# Altium PCB 2017_CARTE_PUISSANCE.PCBDOC
Units mil, origin at the board's own origin, x right, y up, seen from the top; angles counter-clockwise.
Board outline 1891 x 1418 mil, 4 copper layers (1-TOP, 2-PSSCE, 3-GND, 4-BOTTOM); 50 components, 29 nets, 181 pads, 69 vias.
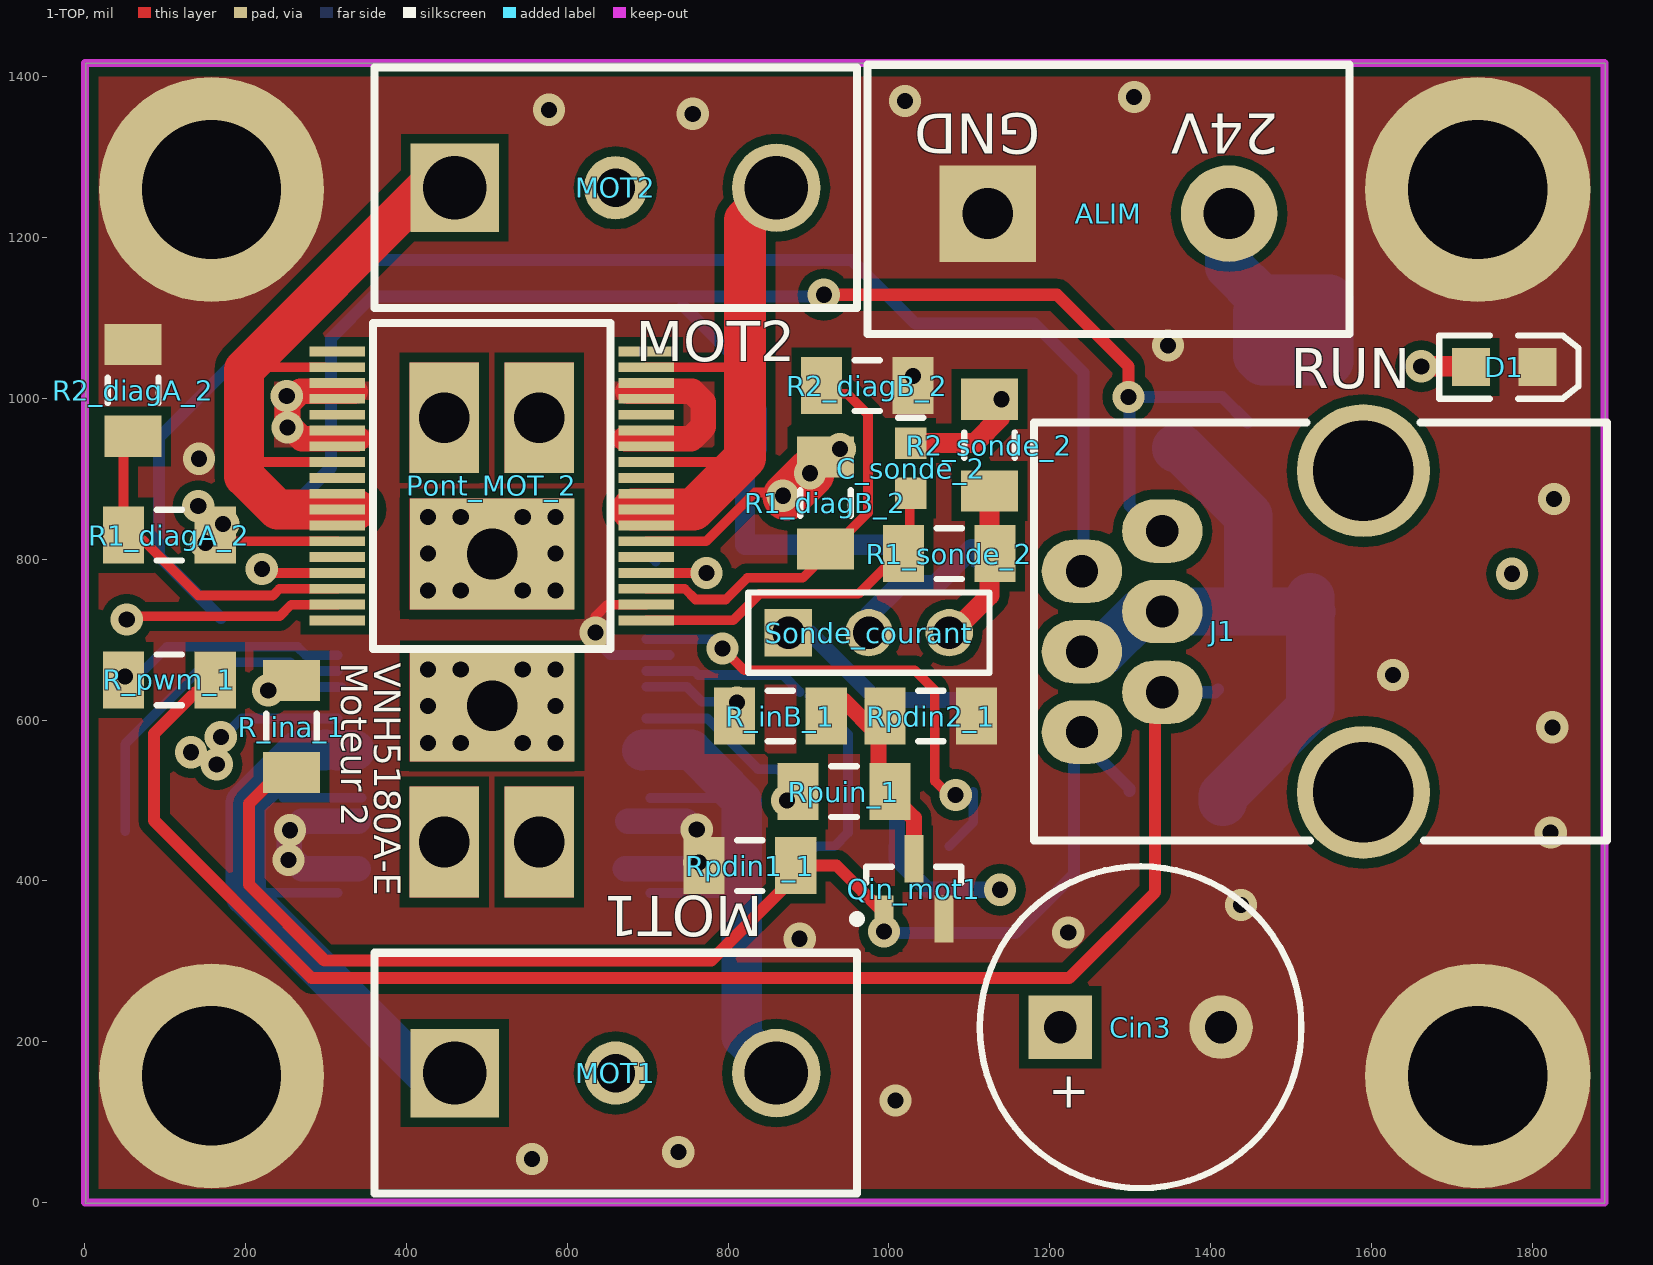
[diagram p0: 1-TOP view]
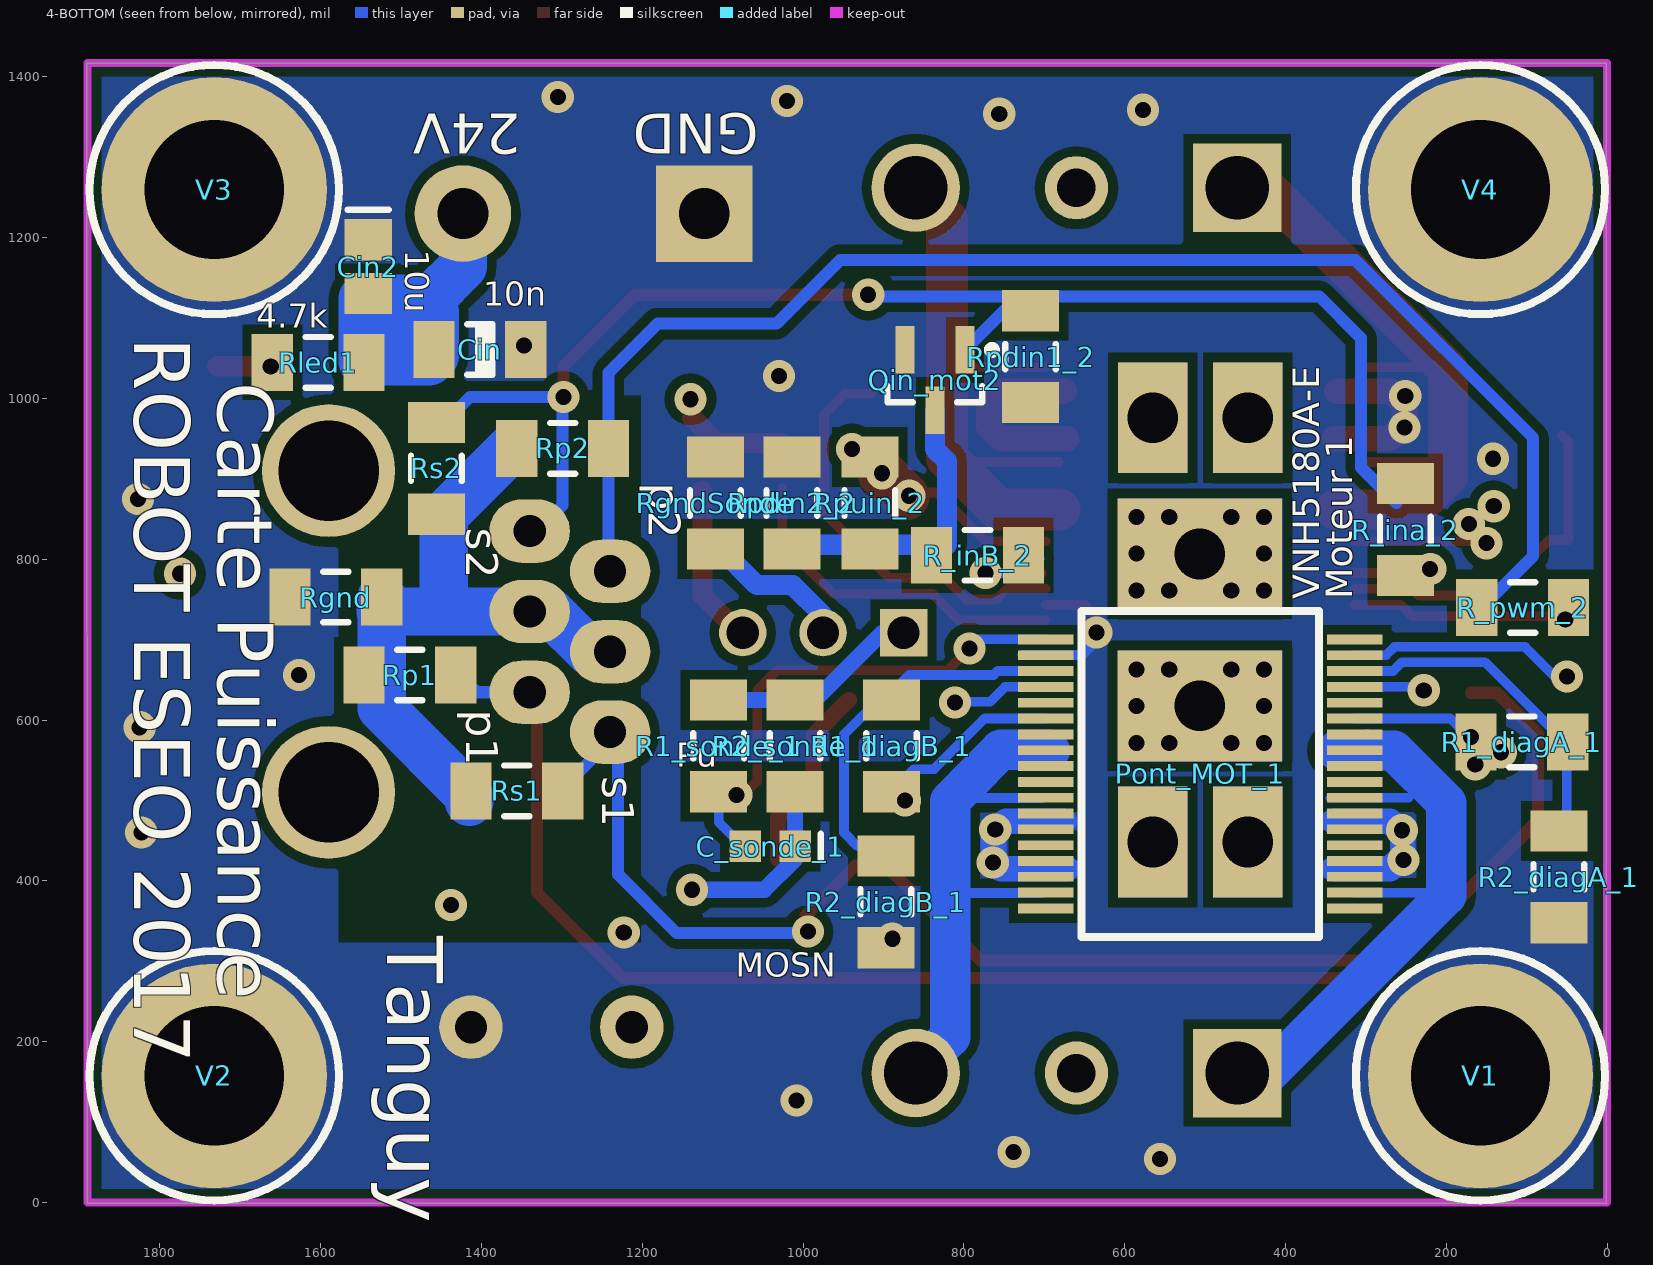
[diagram p1: 4-BOTTOM view, seen from below]
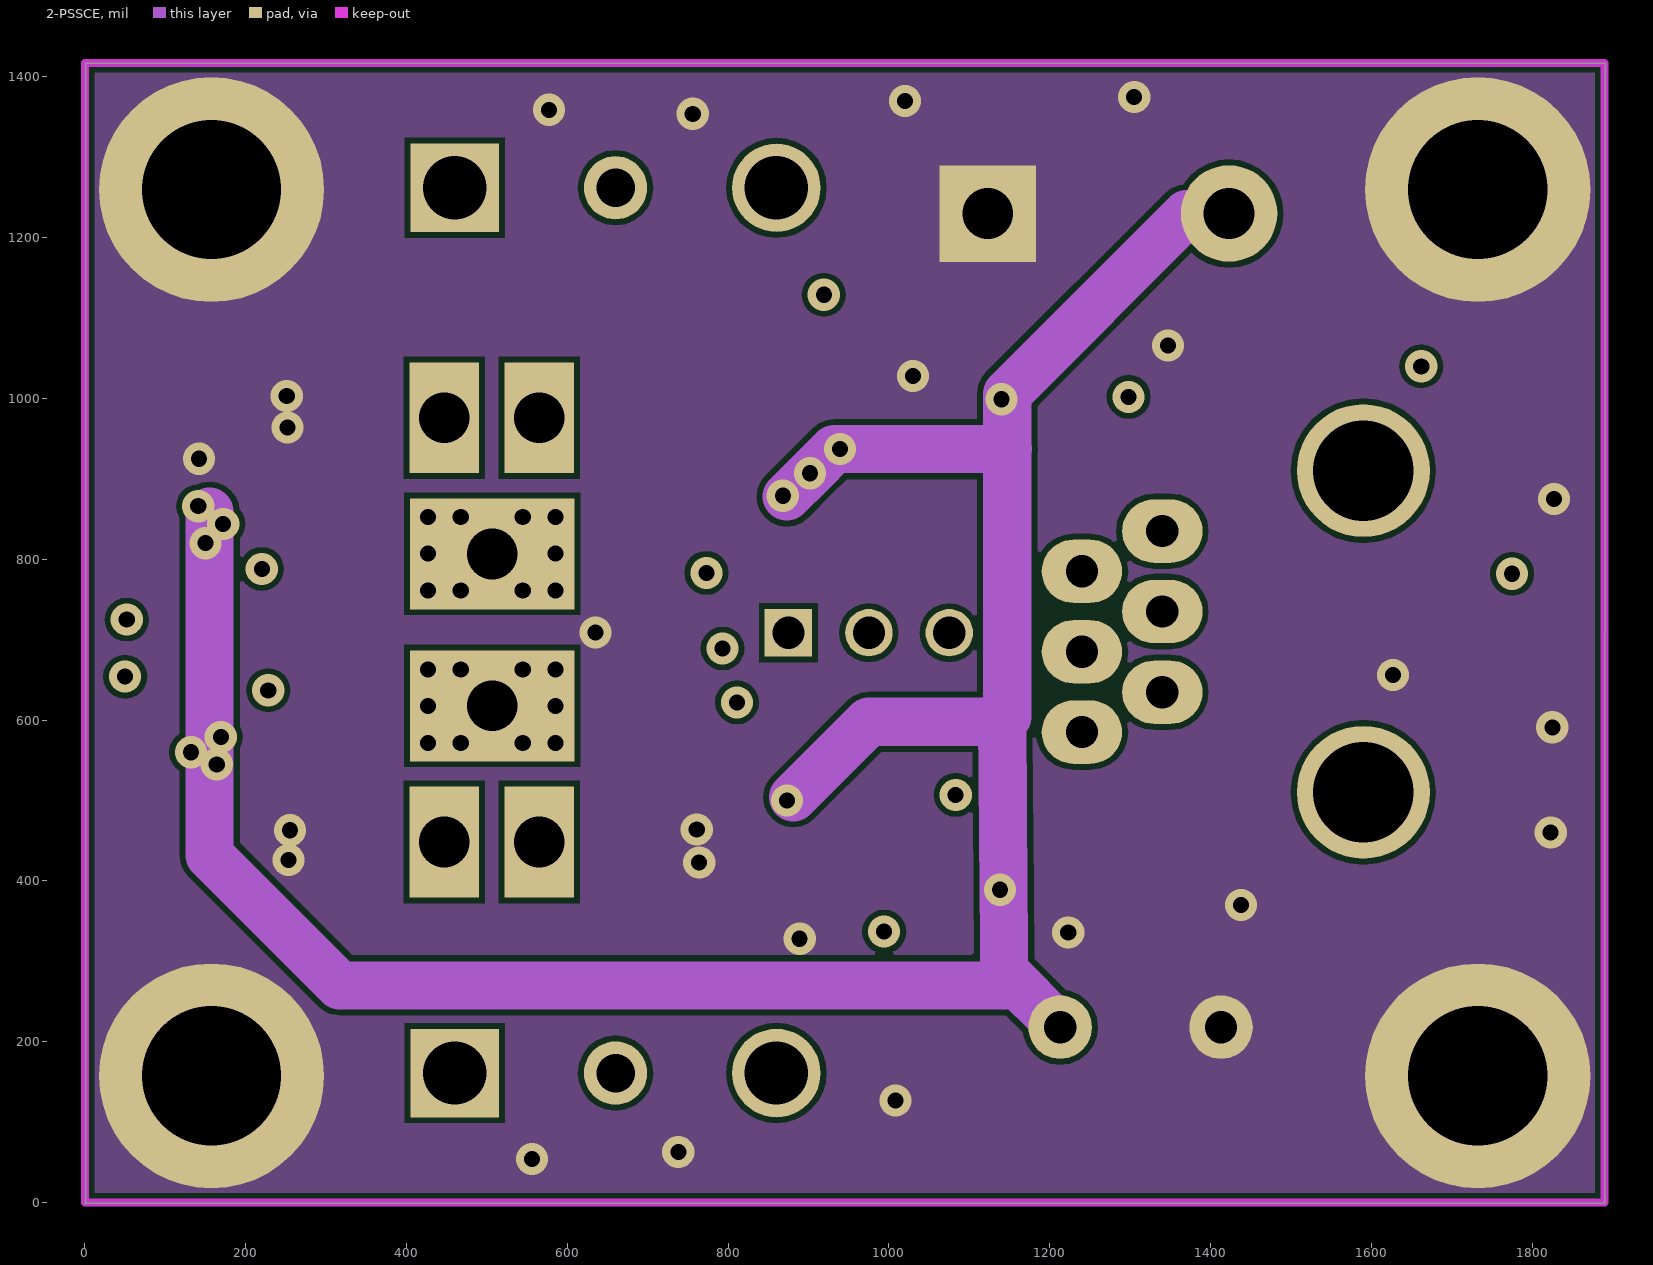
[diagram p2: 2-PSSCE]
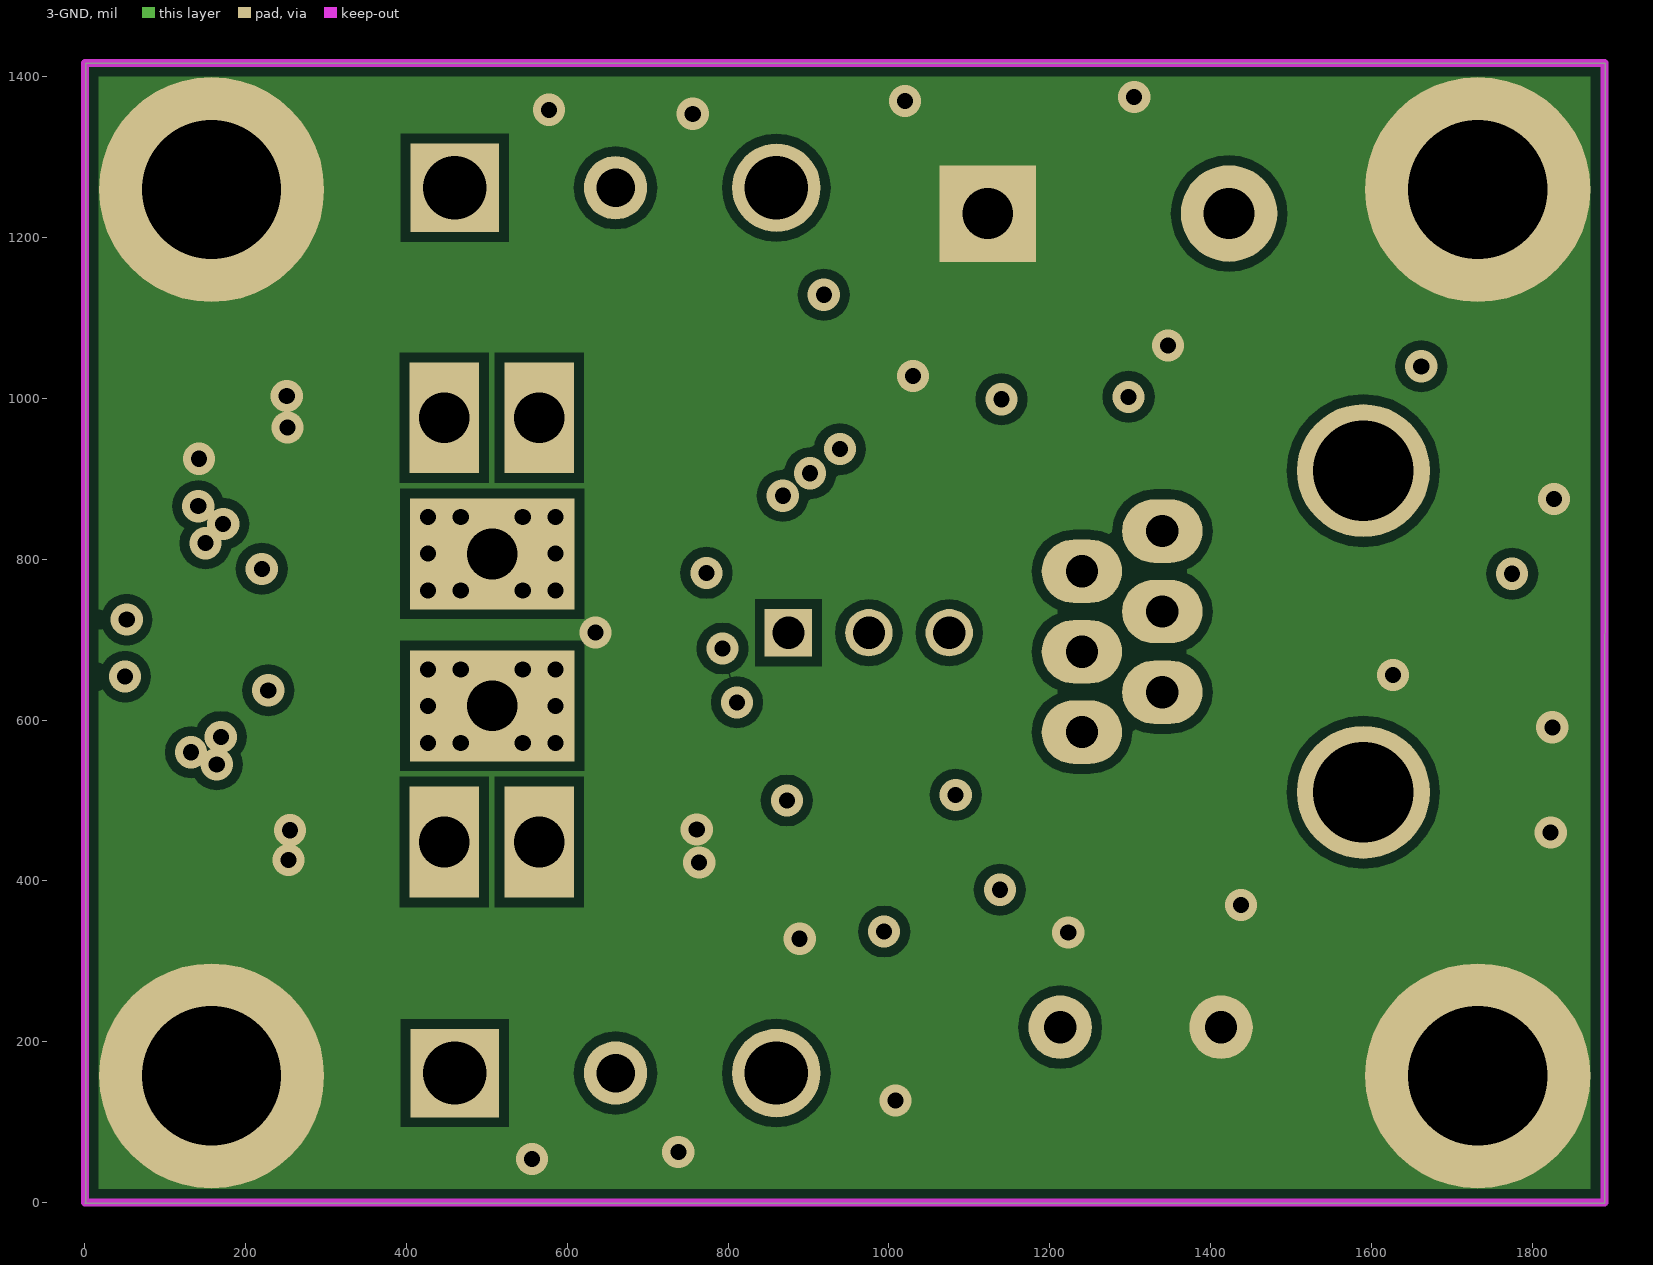
[diagram p3: 3-GND]
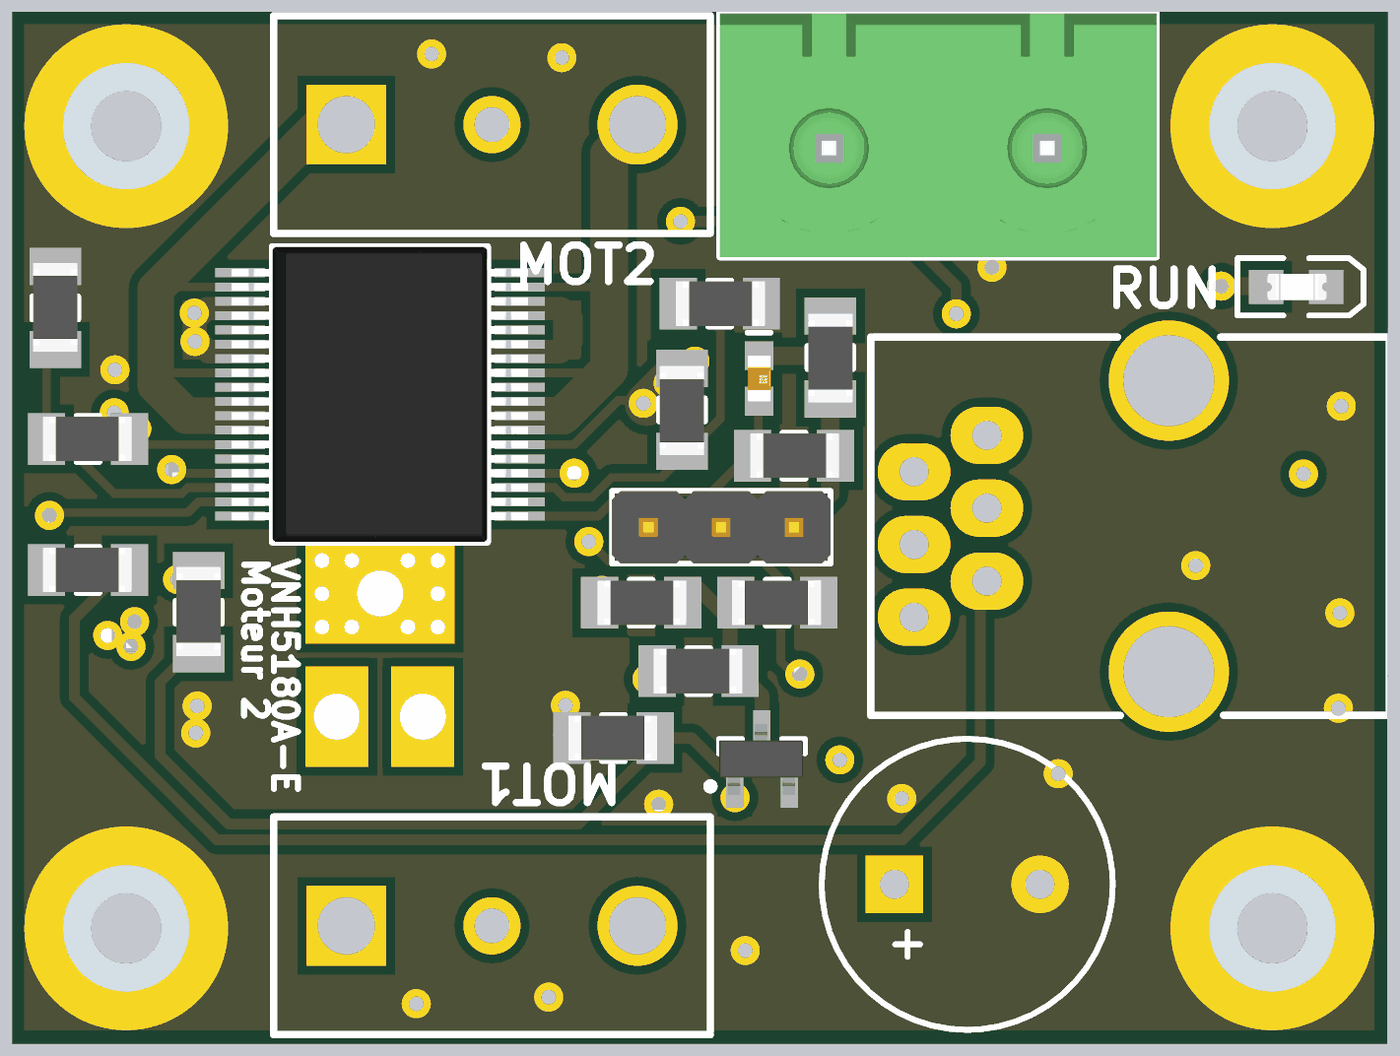
[diagram p4: 3D render of the assembled board from above, using the file's embedded part models]
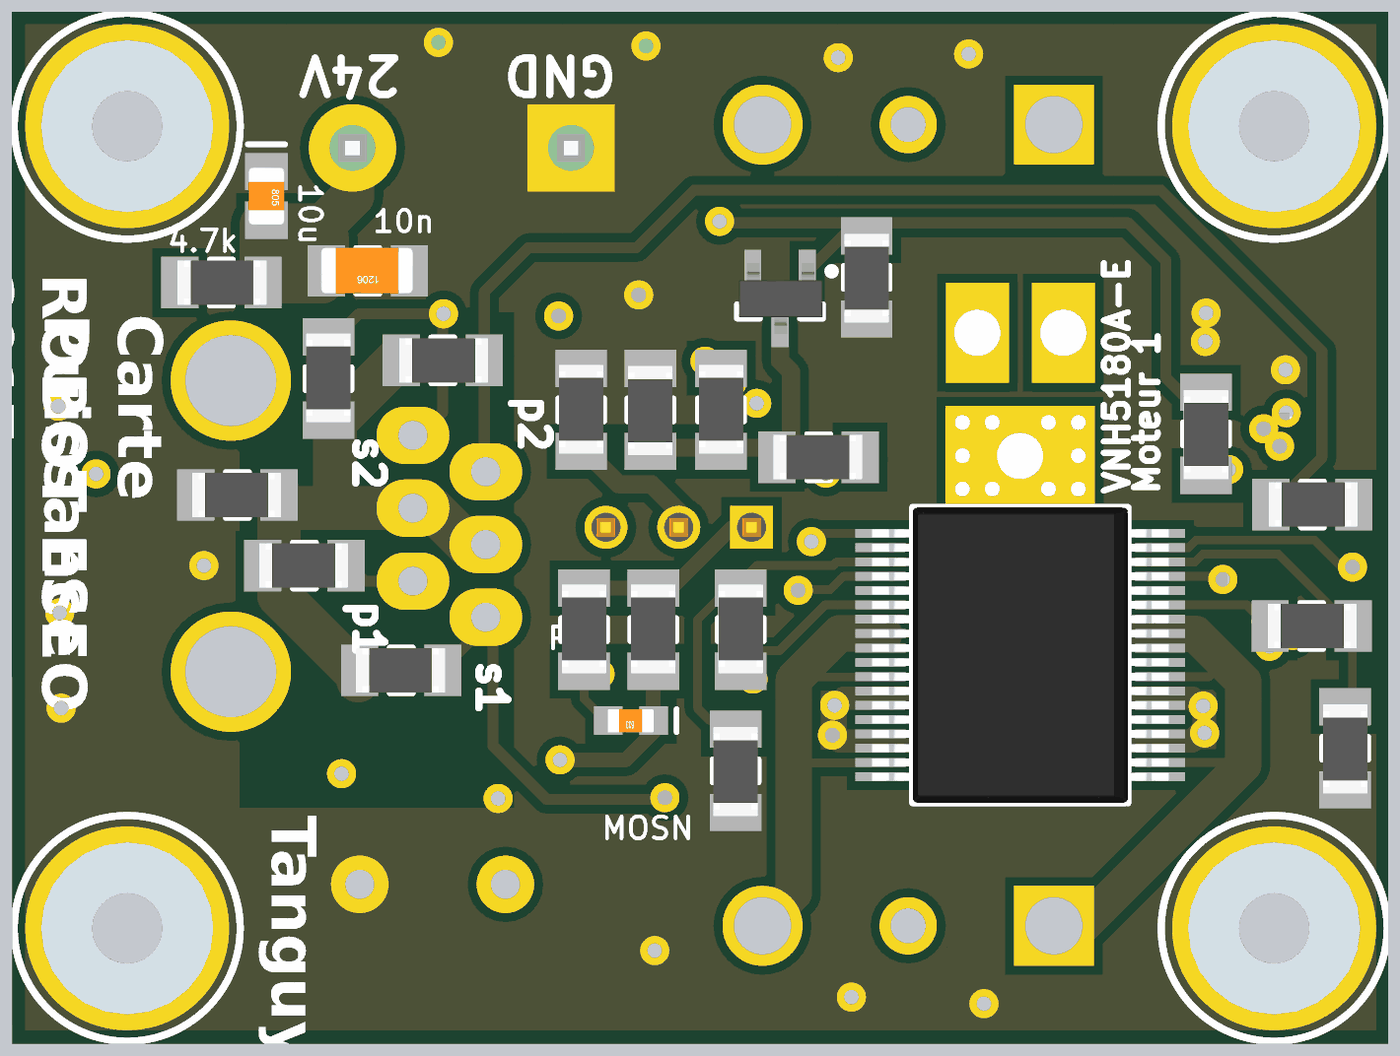
[diagram p5: 3D render of the assembled board from below, using the file's embedded part models]

## Layer stack, top to bottom
Top Solder: solder mask 0.4, Solder Resist, Dk 3.5
1-TOP: signal copper 1.4
Dielectric1: prepreg 12.6, FR-4, Dk 4.8
2-PSSCE: signal copper 1.4
Dielectric2: core 12.6, FR-4, Dk 4.8
3-GND: signal copper 1.4
Dielectric3: prepreg 12.6, FR-4, Dk 4.8
4-BOTTOM: signal copper 1.4
Bottom Solder: solder mask 0.4, Solder Resist, Dk 3.5

## Board outline
1891,1417 1890,-1 0,-1 1,0 1,1417

## Design rules (kind name [scope] priority, off if disabled: settings)
Clearance Clearance_2 [InNamedPolygon('2-MOT1_1') Or  InNamedPolygon('1-GND') Or  InNamedPolygon('3-GND') Or  InNamedPolygon('2-MOT1_2') Or  InNamedPolygon('2-MOT2_1') Or  InNamedPolygon('2-MOT2_2') Or  InNamedPolygon('4-GND') Or  InNamedPolygon('2-24V')] p1: gap=12
Clearance Clearance_1 [InNamedPolygon('2-MOT1_1') Or  InNamedPolygon('2-24V') Or  InNamedPolygon('2-MOT2_1') Or  InNamedPolygon('2-MOT2_2') Or  InNamedPolygon('2-MOT1_2')] p2: gap=300
Clearance [All] p3: gap=7
FabricationTestPointUsage TestPointUsage [All] p1: valid=0 allowmultiple=FALSE
FabricationTestpoint Testpoint [(IsPad And (OnTopLayer Or OnBottomLayer))] p1: side=3 testpointundercomponent=TRUE minsize=40 maxsize=100 preferedsize=60 minholesize=0 maxholesize=40 preferedholesize=32 testpointgrid=1 allowsidetop=TRUE allowsidebottom=TRUE usegrid=TRUE gridtolerance=0.01
PlaneClearance [All] p1: clearance=10
PlaneConnect [All] p1: planeconnectstyle=Direct reliefexpansion=25 reliefentries=4 reliefconductorwidth=12 reliefairgap=15
PolygonConnect [All] p1: connectstyle=Direct reliefconductorwidth=10 reliefentries=4 polygonreliefangle="90 Angle" airgapwidth=10
RoomDefinition 2017_CARTE_PUISSANCE [InComponentClass('2017_CARTE_PUISSANCE')] p1: confinementstyle=ConfineIn formatcopy=TRUE lockcomponents=FALSE outline 1977,113 3421,113 3421,545 1977,545
RoutingLayers RoutingLayers_1 [All] p1: top layer_v5=TRUE mid layer 1_v5=FALSE mid layer 2_v5=FALSE bottom layer_v5=TRUE
RoutingLayers [All] p2: top layer_v5=TRUE mid layer 1_v5=FALSE mid layer 2_v5=FALSE bottom layer_v5=TRUE
RoutingVias [All] p1: holewidth=28 width=50 viastyle="Through Hole" minholewidth=28 minwidth=50 maxholewidth=28 maxwidth=50
SolderMaskExpansion [All] p1: expansion=0
Width [All] p1: maxlimit=60 minlimit=10 preferedwidth=15
24 further rules are at their usual default settings.

## Components (designator, comment, footprint, x,y, rotation, side; value= is the part's Value field where it differs from the comment)
ALIM "BORNIER2" BORNIER2_MALE_DROIT 1273,1230 r0 top
C_sonde_1 "33nF" C0603_N 1041,443 r0 bottom
C_sonde_2 "33nF" C0603_N 1027,913 r270 top
Cin "10uF" C1206_N 1402,1061 r0 bottom
Cin2 "10nF" C0805_N 1541,1164 r270 bottom
Cin3 "Cin3" COND_POL_RAD_5.08B 1213,218 r0 top
D1 "LED" LED_0805 1765,1039 r0 top
J1 "CdeMot" RJ11_6/6 1240,785 r0 top
MOT1 "BORNIER3" BORNIER3 460,161 r0 top
MOT2 "BORNIER3" BORNIER3 460,1262 r0 top
Pont_MOT_1 "VNH5180A-E" "PowerSSO-36 TP" 506,533 r90 bottom
Pont_MOT_2 "VNH5180A-E" "PowerSSO-36 TP" 506,891.27 r270 top
Qin_mot1 "MOSN" SOT23-3N 1031,390 r90 top
Qin_mot2 "MOSN" SOT23-3N 836,1023 r270 bottom
R1_diagA_1 "100K" R1206_N 106,573 r180 bottom
R1_diagA_2 "100K" R1206_N 105,830 r180 top
R1_diagB_1 "100K" R1206_N 890,568 r90 bottom
R1_diagB_2 "100K" R1206_N 921,870 r270 top
R1_sonde_1 "47" R1206_N 1105,568 r90 bottom
R1_sonde_2 "47" R1206_N 1075,807 r0 top
R2_diagA_1 "22K" R1206_N 60,405 r270 bottom
R2_diagA_2 "22K" R1206_N 60,1010 r90 top
R2_diagB_1 "22K" R1206_N 897,374 r270 bottom
R2_diagB_2 "22K" R1206_N 973,1016 r0 top
R2_sonde_1 "330" R1206_N 1010,568 r90 bottom
R2_sonde_2 "330" R1206_N 1125,942 r270 top
R_ina_1 "1K" R1206_N 257,592 r90 top
R_ina_2 "1K" R1206_N 251,837 r270 bottom
R_inB_1 "1K" R1206_N 865,605 r0 top
R_inB_2 "1K" R1206_N 783,805 r0 bottom
R_pwm_1 "1K" R1206_N 105,650 r180 top
R_pwm_2 "1K" R1206_N 105,740 r180 bottom
Rgnd "100" R1206_N 1581,753 r0 bottom
RgndSonde "100" R1206_N 1109,870 r90 bottom
Rled1 "1.5k" R1206_N 1603,1045 r180 bottom
Rp1 "10k" R1206_N 1489,656 r0 bottom
Rp2 "10k" R1206_N 1299,938 r180 bottom
Rpdin1_1 "10k" R1206_N 827,419 r180 top
Rpdin1_2 "10k" R1206_N 717,1052 r270 bottom
Rpdin2_1 "22k" R1206_N 1052,605 r180 top
Rpdin2_2 "22k" R1206_N 1014,870 r270 bottom
Rpuin_1 "100k" R1206_N 944,511 r180 top
Rpuin_2 "100k" R1206_N 917,870 r90 bottom
Rs1 "10k" R1206_N 1356,512 r0 bottom
Rs2 "10k" R1206_N 1456,913 r90 bottom
Sonde_courant "Header 3" HDR1X3 875,708.66 r0 top
V1 "Entretoise WURTH CMS" ENTRETOISE_CMS 157.48,157.48 r180 bottom
V2 "Entretoise WURTH CMS" ENTRETOISE_CMS 1732.28,157.48 r180 bottom
V3 "Entretoise WURTH CMS" ENTRETOISE_CMS 1732.28,1259.84 r180 bottom
V4 "Entretoise WURTH CMS" ENTRETOISE_CMS 157.48,1259.84 r180 bottom

## Footprints (in the part's own frame and the unit in brackets; to place one, negate y for a bottom-side part, rotate by r counter-clockwise, add the part's x,y. Pads: shape width x height; smd on the part's side, far side on the other; paste and mask are expansions set on the pad)
BORNIER2_MALE_DROIT [mil] "7.62 mm - Closed Vertical PCB Header - 2p - 691 311 400 102"
  rect 120x120 hole 62.99: 1(-150,0)
  round 120 hole 62.99: 2(150,0)
  silkscreen extent -300,-150 300,185, body extent -300,-150 300,185, height 473
BORNIER3 [mil] "Connector; Header; 3 Position; screw terminal blocks, Pin Spacing=5.08mm"
  rect 110x110 hole 78.74: 1(0,0)
  round 78.74 hole 48: 2(200,0)
  round 110 hole 78.74: 3(400,0)
  silkscreen extent -100,-150 500,150
C0603_N [mm] "Chip Capacitor, Body 1.6x0.8mm, IPC Medium Density"
  rect 1x1 smd: 1(-0.8,0) 2(0.787,0)
  silkscreen extent -1.6,-0.4 -1.6,0.4, body extent -0.8,-0.39 0.8,0.41, height 0.32
C0805_N [mm] "Chip Capacitor, Body 2.0x1.3mm, IPC Medium Density"
  rect 1.3x1.5 smd: 1(-0.85,0) 2(0.85,0)
  silkscreen extent -1.8,-0.65 -1.8,0.65, body extent -0.99,-0.63 1.01,0.63, height 0.8
C1206_N [mm] "Chip Capacitor, Body 3.2x1.6mm, IPC Medium Density"
  rect 1.3x1.8 smd: 1(-1.45,0) 2(1.45,0)
  silkscreen extent -0.4,-0.8 0.4,0.8, body extent -1.57,-0.81 1.63,0.79, height 1.02
COND_POL_RAD_5.08B [mil] "Capacitor; Polarized; Radial; 10.16mm x 5.08mm"
  rect 79x79 / inner round 79 / far side round 79 hole 40: 1(0,0)
  round 79 hole 40: 2(200,0)
  silkscreen extent -100,-200 300,200
ENTRETOISE_CMS [mil] "Entretoise CMS Wurth trou 4.4mm"
  round 280 hole 173.23: 1(0,0)
  silkscreen extent -155,-155 155,155, body extent -118,-118 118,117, height 118
HDR1X3 [mm]
  rect 1.5x1.5 hole 1.016: 1(0,0)
  round 1.5 hole 1.016: 2(2.54,0) 3(5.08,0)
  silkscreen extent -1.27,-1.27 6.35,1.27, body extent -1.27,-1.27 6.35,1.27, height 10.1
LED_0805 [mm] "SM LED; 2 Flat Leads"
  rect 1.2x1.2 smd: 1(-1.05,0) 2(1.05,0)
  silkscreen extent -2.05,-1 2.35,1, body extent -1.05,-0.64 1.06,0.64, height 1.2
"PowerSSO-36 TP" [mm] "PowerSSO-36 TP"
  rect 3.5x2.2 hole 1.6: 0(-2.15,-1.5) 0(-2.15,1.5)
  rect 3.5x5.2 hole 1.6: 0(2.15,0.01)
  rect 0.31x1.75 smd: 1(-4.25,-4.875) 2(-3.75,-4.875) 3(-3.25,-4.875) 4(-2.75,-4.875) 5(-2.25,-4.875) 6(-1.75,-4.875) 7(-1.25,-4.875) 8(-0.75,-4.875) 9(-0.25,-4.875) 10(0.25,-4.875) 11(0.75,-4.875) 12(1.25,-4.875) 13(1.75,-4.875) 14(2.25,-4.875) 15(2.75,-4.875) 16(3.25,-4.875) 17(3.75,-4.875) 18(4.25,-4.875) 19(4.25,4.875) 20(3.75,4.875) 21(3.25,4.875) 22(2.75,4.875) 23(2.25,4.875) 24(1.75,4.875) 25(1.25,4.875) 26(0.75,4.875) 27(0.25,4.875) 28(-0.25,4.875) 29(-0.75,4.875) 30(-1.75,4.875) 31(-1.25,4.875) 32(-2.25,4.875) 33(-3.25,4.875) 34(-2.75,4.875) 35(-3.75,4.875) 36(-4.25,4.875)
  1-TOP region: -3.9,-0.4 -0.4,-0.4 -0.4,-2.6 -3.9,-2.6
  1-TOP region: -3.9,2.6 -0.4,2.6 -0.4,0.4 -3.9,0.4
  1-TOP region: 0.4,2.6 3.9,2.6 3.9,-2.6 0.4,-2.6
  4-BOTTOM region: 0.4,2.6 3.9,2.6 3.9,-2.6 0.4,-2.6
  4-BOTTOM region: -3.9,-0.4 -0.4,-0.4 -0.4,-2.6 -3.9,-2.6
  4-BOTTOM region: -3.9,2.6 -0.4,2.6 -0.4,0.4 -3.9,0.4
  silkscreen extent -5.15,-3.75 5.15,3.75, body extent -5.15,-5.17 5.15,5.17, height 2.33
R1206_N [mm] "Chip Resistor, Body 3.2x1.6mm, IPC Medium Density"
  rect 1.3x1.8 smd: 1(-1.45,0) 2(1.45,0)
  silkscreen extent -0.4,-0.8 0.4,0.8, body extent -1.68,-0.87 1.68,0.87, height 0.71
RJ11_6/6 [mm] "Connector; RJ11; 6P/6C; Low Profil; Right Angle; Pin Spacing=2.54mm"
  oval 2.54x2 hole 1.016: 1(0,-5.08) 2(2.54,-3.82) 3(0,-2.54) 4(2.54,-1.27) 5(0,0) 6(2.54,1.27)
  round 4.2 hole 3.175: FIX1(8.89,3.18) FIX2(8.89,-6.98)
  silkscreen extent -1.51,-8.51 16.59,4.7
SOT23-3N [mm] "SOT23, 3-Leads, Body 2.9x1.3mm, Pitch 0.95mm, Lead Span 2.5mm, IPC Medium Density"
  rect 1.5x0.6 smd: 1(-0.95,0.95) 2(-0.95,-0.95) 3(0.95,0)
  silkscreen extent -1.07,-1.5 0.7,1.92, body extent -1.24,-1.5 1.23,1.5, height 1.1

## Part data
ALIM MOT1 MOT2: "Terminal blocks, 2 pins, pitch=5mm"
C_sonde_1 C_sonde_2: library part Condensateur, "Capacitor"
Cin Cin2: library part Capacitor, "Capacitor"
Cin3: library part CONDENSATEUR_POLARISE, "Polarized Capacitor"
D1: "Typical LED"
J1: library part CONNECTEUR_RJ12
Qin_mot1 Qin_mot2: library part "Transistor MOSFET-N", "N-Channel MOSFET"
R1_diagA_1 R1_diagA_2 R1_diagB_1 R1_diagB_2 R1_sonde_1 R1_sonde_2 R2_diagA_1 R2_diagA_2 R2_diagB_1 R2_diagB_2 R2_sonde_1 R2_sonde_2 R_ina_1 R_ina_2 R_inB_1 R_inB_2 R_pwm_1 R_pwm_2 Rgnd RgndSonde Rled1 Rp1 Rp2 Rpdin1_1 Rpdin1_2 Rpdin2_1 Rpdin2_2 Rpuin_1 Rpuin_2 Rs1 Rs2: library part Resistor, "Resistor"
Sonde_courant: "Header, 3-Pin"
V1 V2 V3 V4: "Entretoise Wurth"

## Via types
v1: diameter 40, hole 20, 1-TOP to 4-BOTTOM, 69 vias

## Nets (pads, with @x,y where several pads share a name; then routed paths per layer and width w, separated by ;. In a path a pad name is that pad's centre, name@x,y a point inside that pad or via, vN(x,y) a via of type N, cw(c..) or ccw(c..) an arc to the next point about the centre after c; other vN are vias at no path point)
24V: ALIM.2 C_sonde_1.1 C_sonde_2.1 Cin2.2 Cin3.1 Cin.2 Pont_MOT_1.13 Pont_MOT_1.24 Pont_MOT_2.13 Pont_MOT_2.24 R1_diagA_1.1 R1_diagA_2.1 R1_diagB_1.1 R1_diagB_2.1 R2_sonde_1.1 R2_sonde_2.1 Rled1.2 Rpuin_1.2 Rpuin_2.2 | length 4924.1
  1-TOP w12: R1_diagA_2.1@162.09,822.37 Pont_MOT_2.13 ; Pont_MOT_2.24 772.7,822.37 833.33,883 v1@863,883
  1-TOP w25: C_sonde_2.1 1106.5,944.5 R2_sonde_2.1@1138,975.99
  1-TOP w60: v1@873,878 v1(902,907)
  2-PSSCE w60: v1@155,859 155,432 317.02,269.98 1143.54,269.98 ; v1@873,878 v1(902,907) v1@932,937 ; v1@881,504 975,598 1141,598 ; v1(939,937) 1147,937 ; 1148,937 1147,937 ; Cin3.1@1214,217 1143.54,287.46 1143.54,269.98 ; ALIM.2@1423,1229 1370,1229 1147,1006 1147,937 ; 1141,598 1147,604 1147,937 ; 1141,598 1142.62,389.04 1143.54,269.98
  4-BOTTOM w12: R1_diagA_1.1@170.5,577.5 194.9,601.9 Pont_MOT_1.13 ; Pont_MOT_1.24 774.1,601.9 837,539 862,539 R1_diagB_1.1@882,519
  4-BOTTOM w20: C_sonde_1.1 1009.5,427.5 C_sonde_1.1@1010,427 ; R2_sonde_1.1 C_sonde_1.1@1010,427 ; v1(1138,389) 1048,389 C_sonde_1.1@1010,427
  4-BOTTOM w60: ALIM.2@1423,1228 1423,1164 1463,1124 1548,1124 1548,1046 1465,1046 1458,1053 1458,1107 1488,1107 1518,1077
  other v1: 873,500 164,545 132,560 169,579 150,820 172,844 141,866 868,879 1140,999
GND: ALIM.1 Cin2.1 Cin3.2 Cin.1 D1.2 Pont_MOT_1.3 Pont_MOT_1.4 Pont_MOT_1.6 Pont_MOT_1.7 Pont_MOT_1.20 Pont_MOT_1.30 Pont_MOT_1.31 Pont_MOT_1.33 Pont_MOT_1.34 Pont_MOT_2.3 Pont_MOT_2.4 Pont_MOT_2.6 Pont_MOT_2.7 Pont_MOT_2.20 Pont_MOT_2.30 Pont_MOT_2.31 Pont_MOT_2.33 Pont_MOT_2.34 Qin_mot1.2 Qin_mot2.2 R2_diagA_1.2 R2_diagA_2.2 R2_diagB_1.2 R2_diagB_2.2 Rgnd.2 RgndSonde.2 Rpdin1_1.2 Rpdin1_2.2 Rpdin2_1.1 Rpdin2_2.1 V1.1 V2.1 V3.1 V4.1 | length 1068.4
  1-TOP w12: v1@635,707 v1(635,709) 635,729 649.63,743.63 Pont_MOT_2.20
  1-TOP w32: 336,1009 268,1009 252,993 252,968 270,950 339,950 ; 672,950 754,950 769,965 769,995 755,1009 675,1009
  4-BOTTOM w12: v1@636,698 653,681 Pont_MOT_1.20@727,681
  4-BOTTOM w32: 340,415 270,415 254,431 254,458 270,474 340.07,474 ; 672,415 754,415 763,424 763,459 748,474 675,474
  other v1: 556,54 738,63 1008,127 889,328 1223,336 1438,370 764,423 253,426 1823,460 255,463 761,464 1825,591 1627,656 1827,875 142,925 252,964 251,1003 1030,1028 1347,1066 756,1354 577,1359 1020,1370 1305,1375
GND_CDE: J1.3 J1.4 Rgnd.1 Rp1.2 Rp2.1 Rs1.2 Rs2.1 | length 871.9
  4-BOTTOM w60: J1.3@1230,685 1265,685 1313,733 J1.4@1346,733 ; J1.4@1330,735 1444,735 ; Rp2.1@1357,938 1363,938 1447,854 1447,735 Rgnd.1@1523.91,735 ; Rs1.2@1415,498 1415,506 1523.91,614.91 Rgnd.1@1523.91,735 ; Rgnd.1 Rgnd.1@1523.91,735 ; Rgnd.1@1525.09,735 Rgnd.1@1523.91,735
I_SONDE_1: R1_sonde_1.2 R2_sonde_1.2 Sonde_courant.1 | length 247.3
  4-BOTTOM w20: Sonde_courant.1@875,708 902,708 984.91,625.09 R1_sonde_1.2@1088,625.09
I_SONDE_2: R1_sonde_2.2 R2_sonde_2.2 Sonde_courant.3 | length 202
  1-TOP w25: Sonde_courant.3@1074,704 1125,755 R2_sonde_2.2
IN1_2: Qin_mot1.3 R_inB_1.2 Rpdin2_1.2 Rpuin_1.1 | length 234
  1-TOP w20: R_inB_1.2@943,625 987,581 987,522 1031,478 Qin_mot1.3
IN2_2: Qin_mot2.3 R_inB_2.2 Rpdin2_2.2 Rpuin_2.1 | length 372.5
  4-BOTTOM w25: Qin_mot2.3 836,937 821,922 821,818 1014,818 Rpdin2_2.2@1018,814
MOT1+: MOT1.1 Pont_MOT_1.2 Pont_MOT_1.8 Pont_MOT_1.10 Pont_MOT_1.11 Pont_MOT_1.12 | length 818.8
  4-BOTTOM w12: 210,390 214.64,385.36 Pont_MOT_1.2 ; 246.53,503.47 Pont_MOT_1.8@344.07,503.47
  4-BOTTOM w50: Pont_MOT_1.11@299,563 298,562 265,562 200,497 200,382 424,158 MOT1.1@459,158 ; Pont_MOT_1.11 335.47,562.53 Pont_MOT_1.11@336,562
MOT1-: MOT1.3 Pont_MOT_1.25 Pont_MOT_1.26 Pont_MOT_1.27 Pont_MOT_1.29 Pont_MOT_1.35 | length 704.4
  4-BOTTOM w12: Pont_MOT_1.35@702.93,385 797,385 ; Pont_MOT_1.29@702.93,503 798,503
  4-BOTTOM w50: Pont_MOT_1.26@693,562 694,563 754,563 799,518 799,517.46 817,499.46 817,206 MOT1.3@867,156
MOT2+: MOT2.1 Pont_MOT_2.2 Pont_MOT_2.8 Pont_MOT_2.10 Pont_MOT_2.11 Pont_MOT_2.12 | length 830.9
  1-TOP w12: 180.38,921 Pont_MOT_2.8@298.07,921 ; 228,1039 Pont_MOT_2.2@298.07,1039
  1-TOP w50: Pont_MOT_2.11@338,862 239.38,862 198,903.38 198,1036 421,1259 MOT2.1@459,1259
MOT2-: MOT2.3 Pont_MOT_2.25 Pont_MOT_2.26 Pont_MOT_2.27 Pont_MOT_2.29 Pont_MOT_2.35 | length 777.4
  1-TOP w12: Pont_MOT_2.29@681.93,921 816,921 ; Pont_MOT_2.35 821,1038.91
  1-TOP w52: Pont_MOT_2.26@681.2,862 757,862 816,921 821,926 821,1038.91 821,1222 MOT2.3@862,1263
NetC_sonde_1_2: C_sonde_1.2 Pont_MOT_1.19 R1_sonde_1.1 | length 618.8
  1-TOP w12: v1(793,689) 820,662 1032,662 1057,637 1057,524 1078,503 1082,507 v1(1083,507)
  4-BOTTOM w12: Pont_MOT_1.19 782.68,700.32 v1@796,687 ; C_sonde_1.2@1075,443 1105,473 R1_sonde_1.1
NetC_sonde_2_2: C_sonde_2.2 Pont_MOT_2.19 R1_sonde_2.1 | length 435.3
  1-TOP w12: Pont_MOT_2.19 805.95,723.95 839,757 962,757 1026,821 C_sonde_2.2@1026,888
NetD1_1: D1.1 Rled1.1 | length 67
  1-TOP w25: v1(1662,1040) D1.1@1729,1040
NetPont_MOT_1_15: Pont_MOT_1.15 R_ina_1.2 | length 129.7
  4-BOTTOM w12: v1@227,635 233.27,641.27 Pont_MOT_1.15 ; 279,641 Pont_MOT_1.15@319.07,641
  other v1: 228,637
NetPont_MOT_1_16: Pont_MOT_1.16 R1_diagA_1.2 R2_diagA_1.1 | length 418.9
  4-BOTTOM w12: R2_diagA_1.1@50,462 50,570 152,672 255,672 266.05,660.95 Pont_MOT_1.16
NetPont_MOT_1_17: Pont_MOT_1.17 R_pwm_1.2 | length 288.5
  4-BOTTOM w12: v1@51,640 102,691 264.46,691 274.82,680.64 Pont_MOT_1.17
  other v1: 50,654
NetPont_MOT_1_21: Pont_MOT_1.21 R1_diagB_1.2 R2_diagB_1.1 | length 455.7
  4-BOTTOM w12: Pont_MOT_1.21 758.05,660.95 763,656 868,656 R1_diagB_1.2@889,635 ; R2_diagB_1.1 908.91,443 932,443 949,460 949,582 R1_diagB_1.2@901,630
NetPont_MOT_1_22: Pont_MOT_1.22 R_inB_1.1 | length 122.6
  4-BOTTOM w12: Pont_MOT_1.22 748.73,641.27 767,623 v1@813,623
  other v1: 811,622
NetPont_MOT_2_15: Pont_MOT_2.15 R_ina_2.2 | length 99.1
  1-TOP w12: v1@217,788 222,783 Pont_MOT_2.15
  other v1: 220,788
NetPont_MOT_2_16: Pont_MOT_2.16 R1_diagA_2.2 R2_diagA_2.1 | length 431.4
  1-TOP w12: R2_diagA_2.1@56,954 48,946 48,824 72,824 141,755 233.67,755 241.98,763.32 Pont_MOT_2.16
NetPont_MOT_2_17: Pont_MOT_2.17 R_pwm_2.2 | length 266.1
  1-TOP w12: v1@54,729 242,729 256.63,743.63 Pont_MOT_2.17
  other v1: 52,725
NetPont_MOT_2_21: Pont_MOT_2.21 R1_diagB_2.2 R2_diagB_2.1 | length 518.1
  1-TOP w12: Pont_MOT_2.21 746.02,763.32 759.33,750 797,750 824,777 893,777 974,858 974,980 948,1006 R2_diagB_2.1@915,1006
NetPont_MOT_2_22: Pont_MOT_2.22 R_inB_2.1 | length 138.5
  1-TOP w12: Pont_MOT_2.22@702.93,783 759,783 v1@773,797 ; v1(773,783) v1@780,783
  4-BOTTOM w12: R_inB_2.1@706,801 R_inB_2.1@710,797 ; R_inB_2.1@730,783 v1(773,783) v1@780,783
NetRgndSonde_1: RgndSonde.1 Sonde_courant.2 | length 202.7
  4-BOTTOM w25: Sonde_courant.2@975,707 Sonde_courant.2 975,730 1012.82,767.82 1057.51,767.82 1102.6,812.91 RgndSonde.1 RgndSonde.1@1109,801.57
PWM1: J1.2 R_pwm_1.1 Rp1.1 | length 1910.1
  1-TOP w15: R_pwm_1.1@169.09,634 137,634 86,583 86,475 282,279 1224,279 1331,386 J1.2@1331,633
  4-BOTTOM w15: J1.2@1330,634.61 1405.61,634.61 Rp1.1@1409,638
PWM2: J1.5 R_pwm_2.1 Rp2.2 | length 1806.6
  4-BOTTOM w15: R_pwm_2.1@169.09,727 92,804.09 92,951 313,1172 954,1172 1033,1093 1181,1093 1242,1032 1242,795 J1.5@1232,785
SENS1: J1.1 Qin_mot1.1 R_ina_1.1 Rpdin1_1.1 Rs1.1 | length 1614.8
  1-TOP w15: R_ina_1.1 242.91,534.91 204,496 204,395 298,301 779,301 Rpdin1_1.1@890,412 ; Rpdin1_1.1 935,419 Qin_mot1.1@997,357
  4-BOTTOM w15: v1@997,335 1157,335 1230,408 J1.1@1230,585 ; J1.1@1234,580 1298.91,515.09 Rs1.1
  other v1: 994,337
SENS2: J1.6 Qin_mot2.1 R_ina_2.1 Rpdin1_2.1 Rs2.2 | length 1757.1
  1-TOP w15: v1(919,1129) 1209,1129 1298,1040 v1(1298,1002) v1@1298,1001
  4-BOTTOM w15: R_ina_2.1@262,870.09 306,914.09 306,1075 358,1127 916,1127 v1@918,1129 ; Rpdin1_2.1@744,1115 Qin_mot2.1 ; J1.6@1358.91,837 1329,837 1299,867 1299,1002 1414.09,1002 Rs2.2@1446,970.09
pads on no net: J1.FIX1 J1.FIX2 MOT1.2 MOT2.2 Pont_MOT_1.0 Pont_MOT_1.1 Pont_MOT_1.5 Pont_MOT_1.9 Pont_MOT_1.14 Pont_MOT_1.18 Pont_MOT_1.23 Pont_MOT_1.28 Pont_MOT_1.32 Pont_MOT_1.36 Pont_MOT_2.0 Pont_MOT_2.1 Pont_MOT_2.5 Pont_MOT_2.9 Pont_MOT_2.14 Pont_MOT_2.18 Pont_MOT_2.23 Pont_MOT_2.28 Pont_MOT_2.32 Pont_MOT_2.36
copper on no net:
  other v1: 426.47,571.58 467.42,571.58 544.58,571.58 585.53,571.58 426.47,617.25 585.53,617.25 426.47,662.92 467.42,662.92 544.58,662.92 585.53,662.92 426.47,761.35 467.42,761.35 544.58,761.35 585.53,761.35 1775,782 426.47,807.02 585.53,807.02 426.47,852.69 467.42,852.69 544.58,852.69 585.53,852.69

## Polygon pours and split planes (outlines as drawn)
GND on 1-TOP "1-GND" (solid, pour order 7): 2,1417 1888,1417 1888,4 2,4
GND on 2-PSSCE "2-GND" (solid, pour order 8): 2,1417 1890,1417 1890,4 2,4
GND on 3-GND "3-GND" (solid, pour order 6): 3.04,1415.86 1891,1417.82 1891,3.02 2,4
GND on 4-BOTTOM "4-GND" (solid, pour order 5): 1,1417 1890,1416 1890,0 0,-1

## Keep-outs
Keep-Out Layer:
  lines w10: 0,0 1889.76,0 1889.76,1417.32 0,1417.32 0,0

## Other copper
4-BOTTOM:
  pour cut-out: 1201,323 1201,1004 1578,1004 1578,323

## Silkscreen, mask and mechanical layers (free items; w line width, h text height)
Top Overlay:
  text "GND" at 1188,1354 h50 r180
  text "24V" at 1485,1354 h50 r180
  text "MOT2" at 685,1046 h50
  text "RUN" at 1500,1013 h50
  text "Moteur 2" at 319,671 h33 r270
  text "VNH5180A-E" at 360,671 h33 r270
  text "MOT1" at 843,381 h50 r180
Bottom Overlay:
  text "GND" at 1055,1354 h50 r180
  text "24V" at 1351,1354 h50 r180
  text "10u" at 1495,1185 h30 r90
  text "10n" at 1398,1115 h30
  text "4.7k" at 1680,1088 h30
  text "ROBOT ESEO 2017" at 1855,1076 h120 r90
  text "Carte Puissance" at 1751,1020 h120 r90
  text "p2" at 1192,895 h40 r90
  text "s2" at 1419,839 h40 r90
  text "Moteur 1" at 317,750 h33 r270
  text "VNH5180A-E" at 358,750 h33 r270
  text "p1" at 1419,613 h40 r90
  text "Pu" at 1158,542 h30
  text "s1" at 1250,530 h40 r90
  text "Tanguy" at 1540,331 h120 r90
  text "MOSN" at 1084,281 h30

## Dimensions
0.01,1318.9 to 1889.76,1417.32 on Mechanical 15
0,0 to 0,1417.32 on Mechanical 15
0,0 to 157.48,157.48 on Mechanical 15
157.48,1259.84 to 0,1417.32 on Mechanical 15
0.01,1318.9 to 157.48,1259.84 on Mechanical 15
1732.28,1259.84 to 1889.76,1417.32 on Mechanical 15

## Text inside footprints (layer, text, board x,y; h text height)
Cin3: Top Overlay "+" at 1198,118 h45